# Altium PCB buckboost.PcbDoc
Units mil, origin at the board's own origin, x right, y up, seen from the top; angles counter-clockwise.
Board outline 1865.03 x 1375.03 mil, 2 copper layers (Top Layer, Bottom Layer); 7 components, 7 nets, 22 pads, 2 vias.
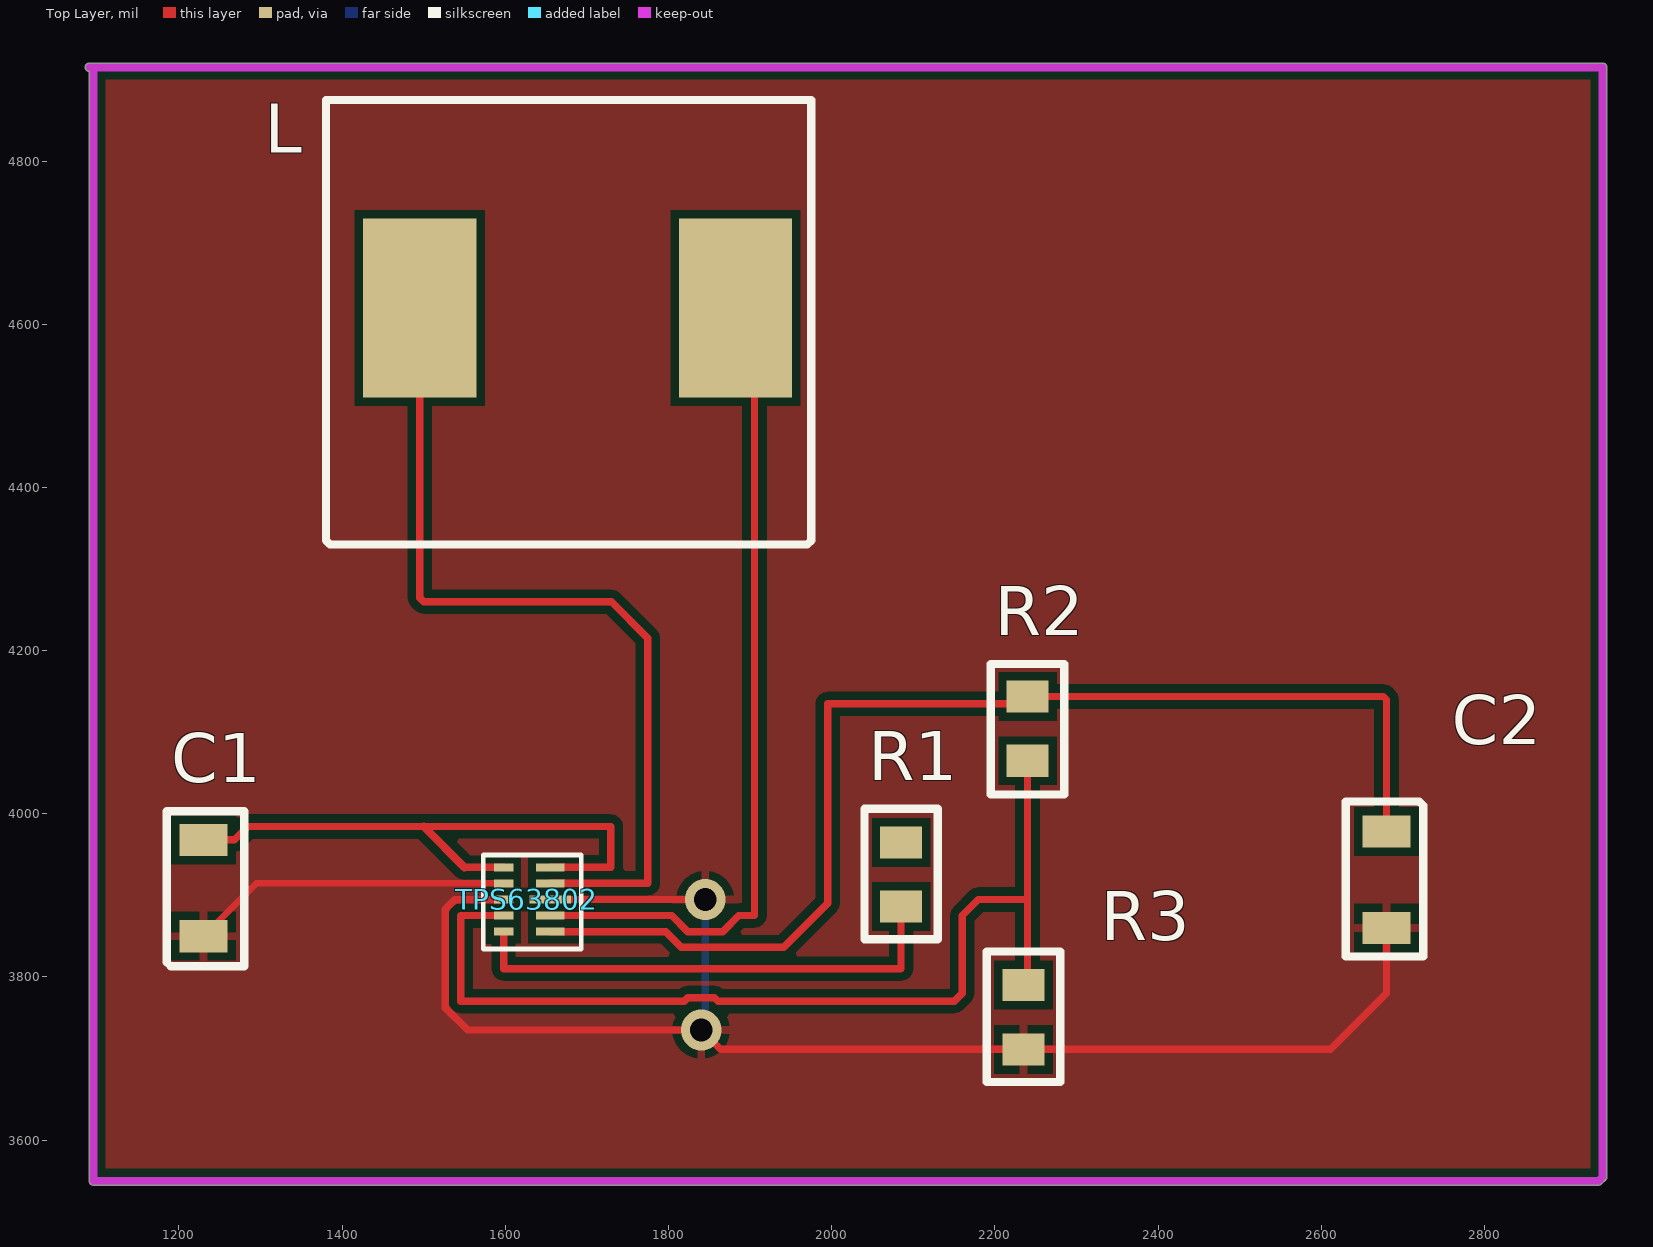
[diagram p0: Top Layer view]
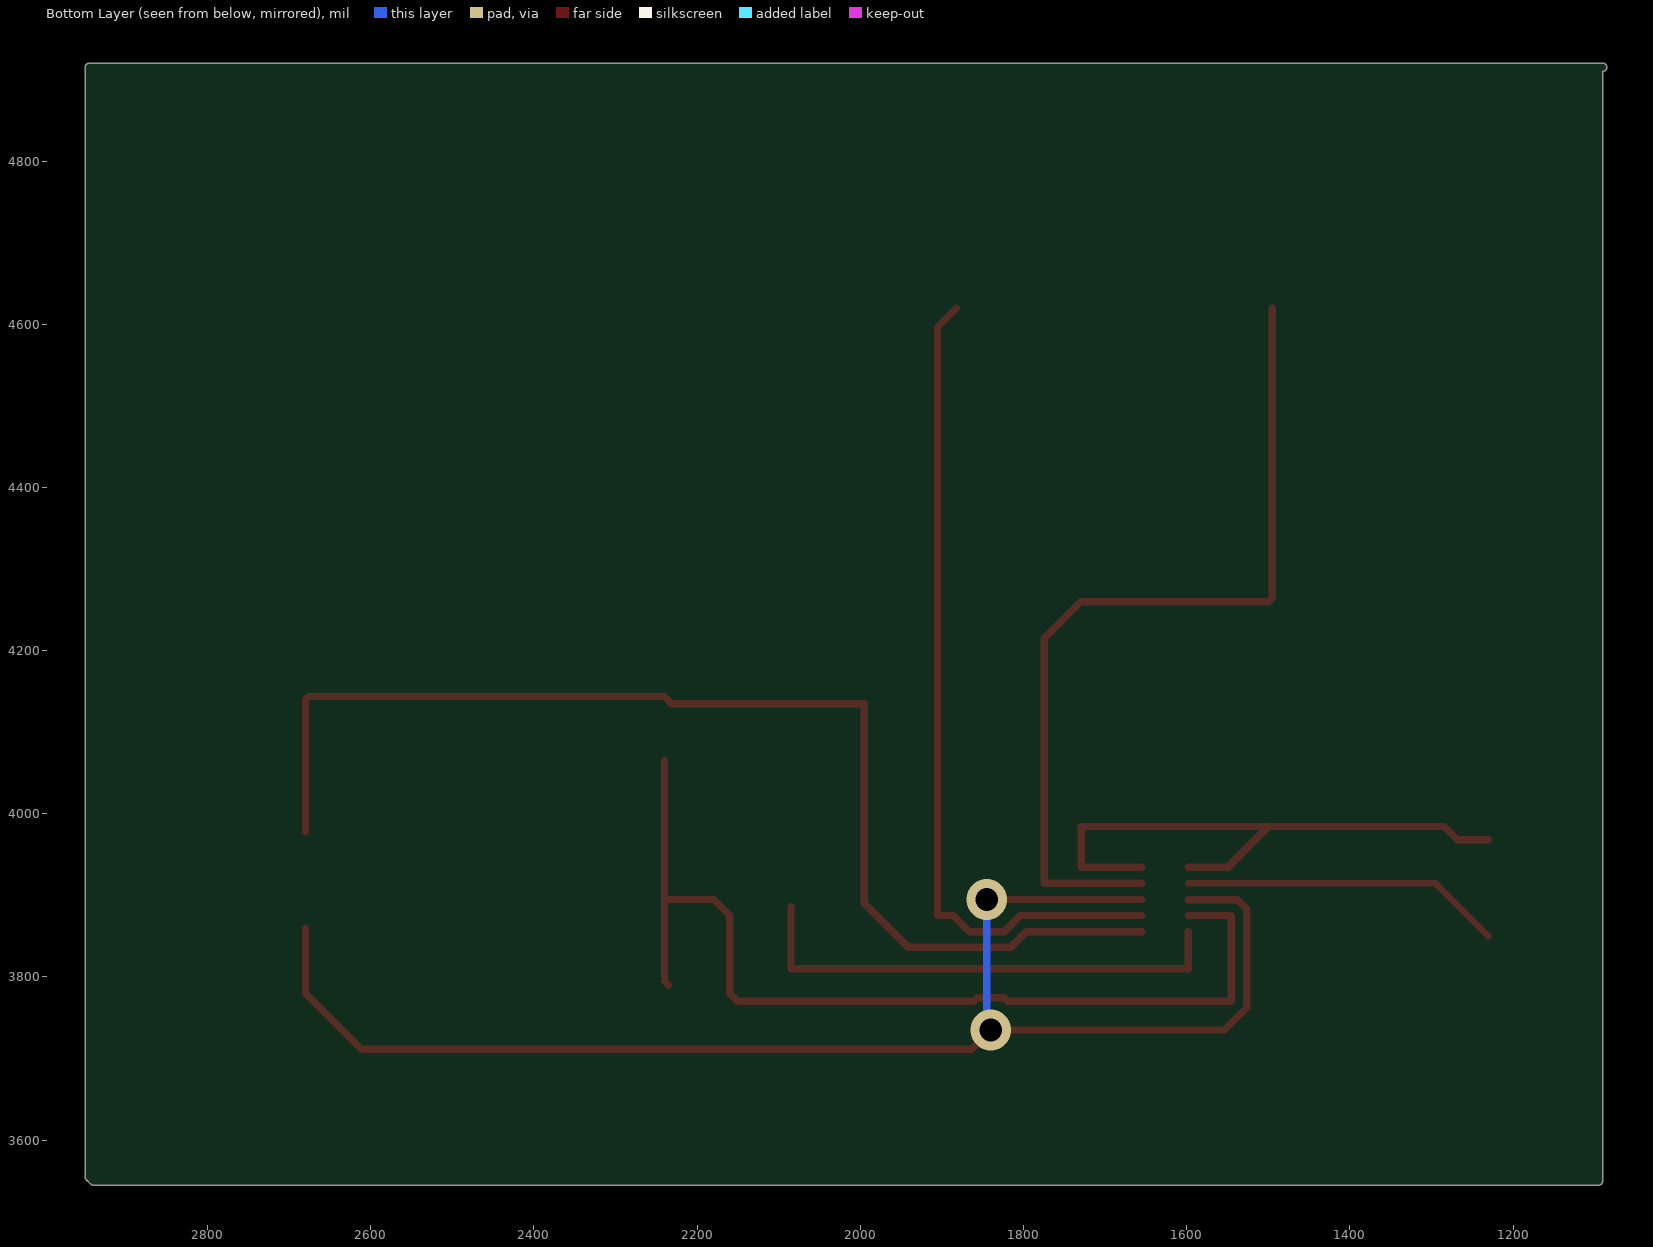
[diagram p1: Bottom Layer view, seen from below]
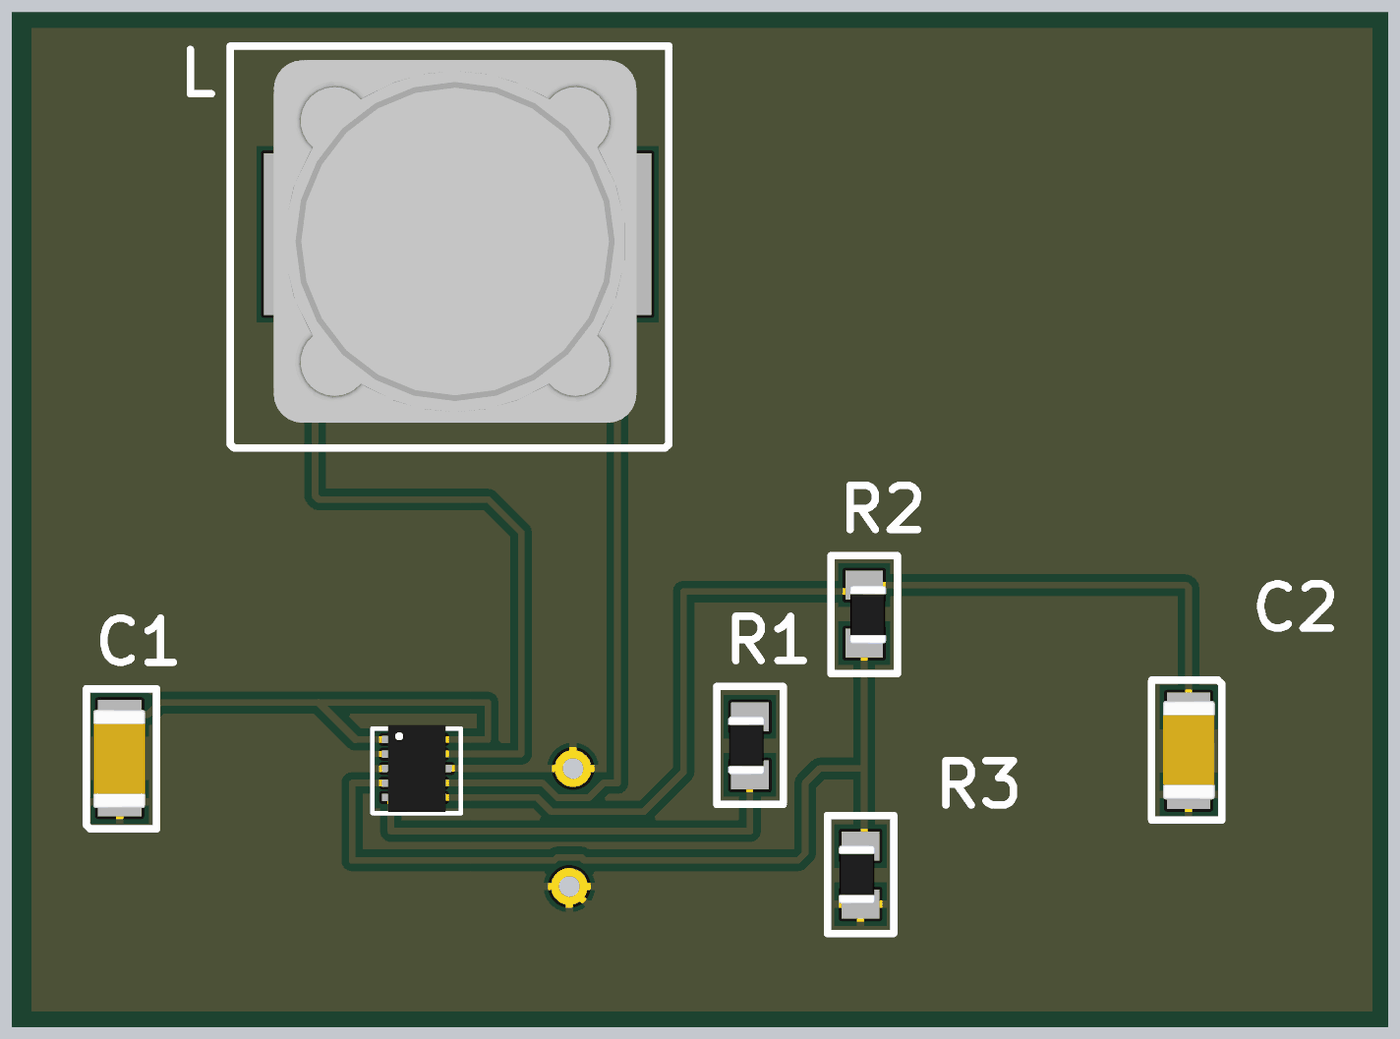
[diagram p2: 3D render of the assembled board from above, using the file's embedded part models]

## Layer stack, top to bottom
Top Solder: solder mask 0.4, Solder Resist, Dk 3.5
Top Layer: signal copper 1.4
Dielectric 1: dielectric 12.6, FR-4, Dk 4.8
Bottom Layer: signal copper 1.4
Bottom Solder: solder mask 0.4, Solder Resist, Dk 3.5

## Board outline
1095,3544.99 cw(c1095,3550) 1089.98,3550 1089.98,4909.98 cw(c1090,4915) 1090,4920.02 2945,4920.02 cw(c2945,4915) 2950.01,4915 2950.01,3555 cw(c2945,3555) 2948.53,3551.44 2948.55,3551.45 2943.55,3546.45 2943.56,3546.47 cw(c2940,3550) 2940,3544.99

## Design rules (kind name [scope] priority, off if disabled: settings)
Clearance [All] p1: gap=10 ignorepadtopadclearanceinfootprint=FALSE except(0: Arc-Hole Track-Hole SMDPad-Hole THPad-Hole Via-Hole Fill-Hole Poly-Hole Region-Hole Text-Hole)
PolygonConnect [All] p1: connectstyle=Relief reliefconductorwidth=10 reliefentries=4 polygonreliefangle="90 Angle" airgapwidth=10
RoutingVias [All] p1: holewidth=28 width=50 viastyle="Through Hole" minholewidth=28 minwidth=50 maxholewidth=28 maxwidth=50
SolderMaskExpansion [All] p1: expansion=4
Width [All] p1: maxlimit=20 minlimit=5 preferedwidth=9 minimp=50.000000 maximp=50.000000 favimp=50.000000
30 further rules are at their usual default settings.

## Components (designator, comment, footprint, x,y, rotation, side; value= is the part's Value field where it differs from the comment)
C1 "10uF" cap 1230,3968.11 r0 top
C2 "22uF" cap 2680,3860 r180 top
L "0.47uH" coil 1495,4620 r0 top
R1 "resistor" resistor 2085,3886.26 r90 top (schematic designator r1)
R2 "resistor" resistor 2240,4143.74 r270 top
R3 "resistor" resistor 2235,3711.26 r90 top
TPS63802 "TPS63802" TPS63802 1597.91,3934.37 r0 top (schematic designator *)

## Footprints (in the part's own frame and the unit in brackets; to place one, negate y for a bottom-side part, rotate by r counter-clockwise, add the part's x,y. Pads: shape width x height; smd on the part's side, far side on the other; paste and mask are expansions set on the pad)
cap [mm]
  rect 1.5x1 smd: 1(0,0) 2(0,-3)
  silkscreen extent -1.14,-3.94 1.27,0.89, body extent -0.91,-3.22 0.89,0.18, height 1.8
coil [mm]
  rect 3.53x5.57 smd: 1(0,0) 2(9.83,0)
  silkscreen extent -2.92,-7.37 12.19,6.48, body extent -1.42,-6.5 11.08,6, height 7.5
resistor [mm]
  rect 1x1.3 smd: 1(0,0) 2(2,0)
  silkscreen extent -1.02,-1.14 3.05,1.14, body extent 0.02,-0.5 2.02,0.75, height 0.8
TPS63802 [mm]
  rect 0.6x0.25 smd: 1(0,0) 2(0,-0.5) 3(0,-1) 4(0,-1.5) 5(0,-2)
  rect 0.9x0.25 smd: 6(1.45,-2) 7(1.45,-1.5) 9(1.45,-0.5) 10(1.45,0)
  rect 1.3x0.25 smd: 8(1.45,-1)
  silkscreen extent -0.64,-2.54 2.41,0.38, body extent -0.11,-2.49 1.89,0.51, height 1

## Part data
C1 C2: library part cap
L: library part coil

## Via types
v1: diameter 50, hole 28, Top Layer to Bottom Layer, 2 vias

## Nets (pads, with @x,y where several pads share a name; then routed paths per layer and width w, separated by ;. In a path a pad name is that pad's centre, name@x,y a point inside that pad or via, vN(x,y) a via of type N, cw(c..) or ccw(c..) an arc to the next point about the centre after c; other vN are vias at no path point)
GND: C1.2 C2.1 R3.1 TPS63802.2 TPS63802.3 TPS63802.8 | length 2230.8
  Top Layer w8: C1.2 1294.69,3914.69 TPS63802.2
  Top Layer w9: TPS63802.3 1598.18,3894.74 1537.87,3894.74 1526.32,3883.18 1526.32,3762.45 1553.76,3735 v1(1840,3735) 1863.74,3711.26 R3.1 2611.26,3711.26 2680,3780 C2.1 ; TPS63802.8 v1(1845,3895)
  Bottom Layer w9: v1(1840,3735) 1845,3735 v1(1845,3895)
Net*_1: C1.1 TPS63802.1 TPS63802.10 | length 749.1
  Top Layer w9: C1.1 1268.11,3968.11 1284.37,3984.37 1500,3984.37 1729.37,3984.37 1729.37,3934.37 TPS63802.10 ; 1550,3934.37 TPS63802.1
  Top Layer w10: 1500,3984.37 1550,3934.37
Net*_4: R2.2 R3.2 TPS63802.4 | length 1240.3
  Top Layer w9: TPS63802.4 1545.32,3875.32 1545.32,3770.32 1819.45,3770.32 1823.64,3774.5 1856.36,3774.5 1860.55,3770.32 2150.32,3770.32 2160,3780 2160,3875.32 2179.68,3895 2240,3895 ; R3.2 2240,3795 2240,3895 ; R2.2 2240,3895
Net*_5: R1.1 TPS63802.5 | length 609
  Top Layer w9: TPS63802.5 1597.91,3810 2085,3810 R1.1
Net*_6: C2.2 R2.1 TPS63802.6 | length 1467
  Top Layer w9: TPS63802.6 1796.64,3855.63 1815.77,3836.5 1941.18,3836.5 1995,3890.32 1995,4135 2231.26,4135 R2.1 2676.26,4143.74 2680,4140 C2.2
Net*_7: L.2 TPS63802.7 | length 1021.1
  Top Layer w9: TPS63802.7 1803.82,3875.32 1823.64,3855.5 1866.36,3855.5 1886.18,3875.32 1905.32,3875.32 1905.32,4596.69 L.2
Net*_9: L.1 TPS63802.9 | length 1075.6
  Top Layer w9: L.1 1495,4265 1500,4260 1730,4260 1774.69,4215.31 1774.69,3914.69 TPS63802.9
pads on no net: R1.2

## Polygon pours and split planes (outlines as drawn)
GND on Top Layer (solid, pour order 2): 1095,4910 2940,4910 2940,3550 1095,3550

## Keep-outs
Top Layer:
  lines w10: 1090,4915 2945,4915 2945,3555 2940,3550 1095,3550 1095,4910